# Altium PCB SolderingStation-CS.PcbDoc (part 1 of 2)
Units mm, origin at the board's own origin, x right, y up, seen from the top; angles counter-clockwise.
Board outline 138.15 x 60.81 mm, 2 copper layers (Top Layer, Bottom Layer), stack 1.671 mm thick; 179 components, 102 nets, 520 pads, 415 vias.
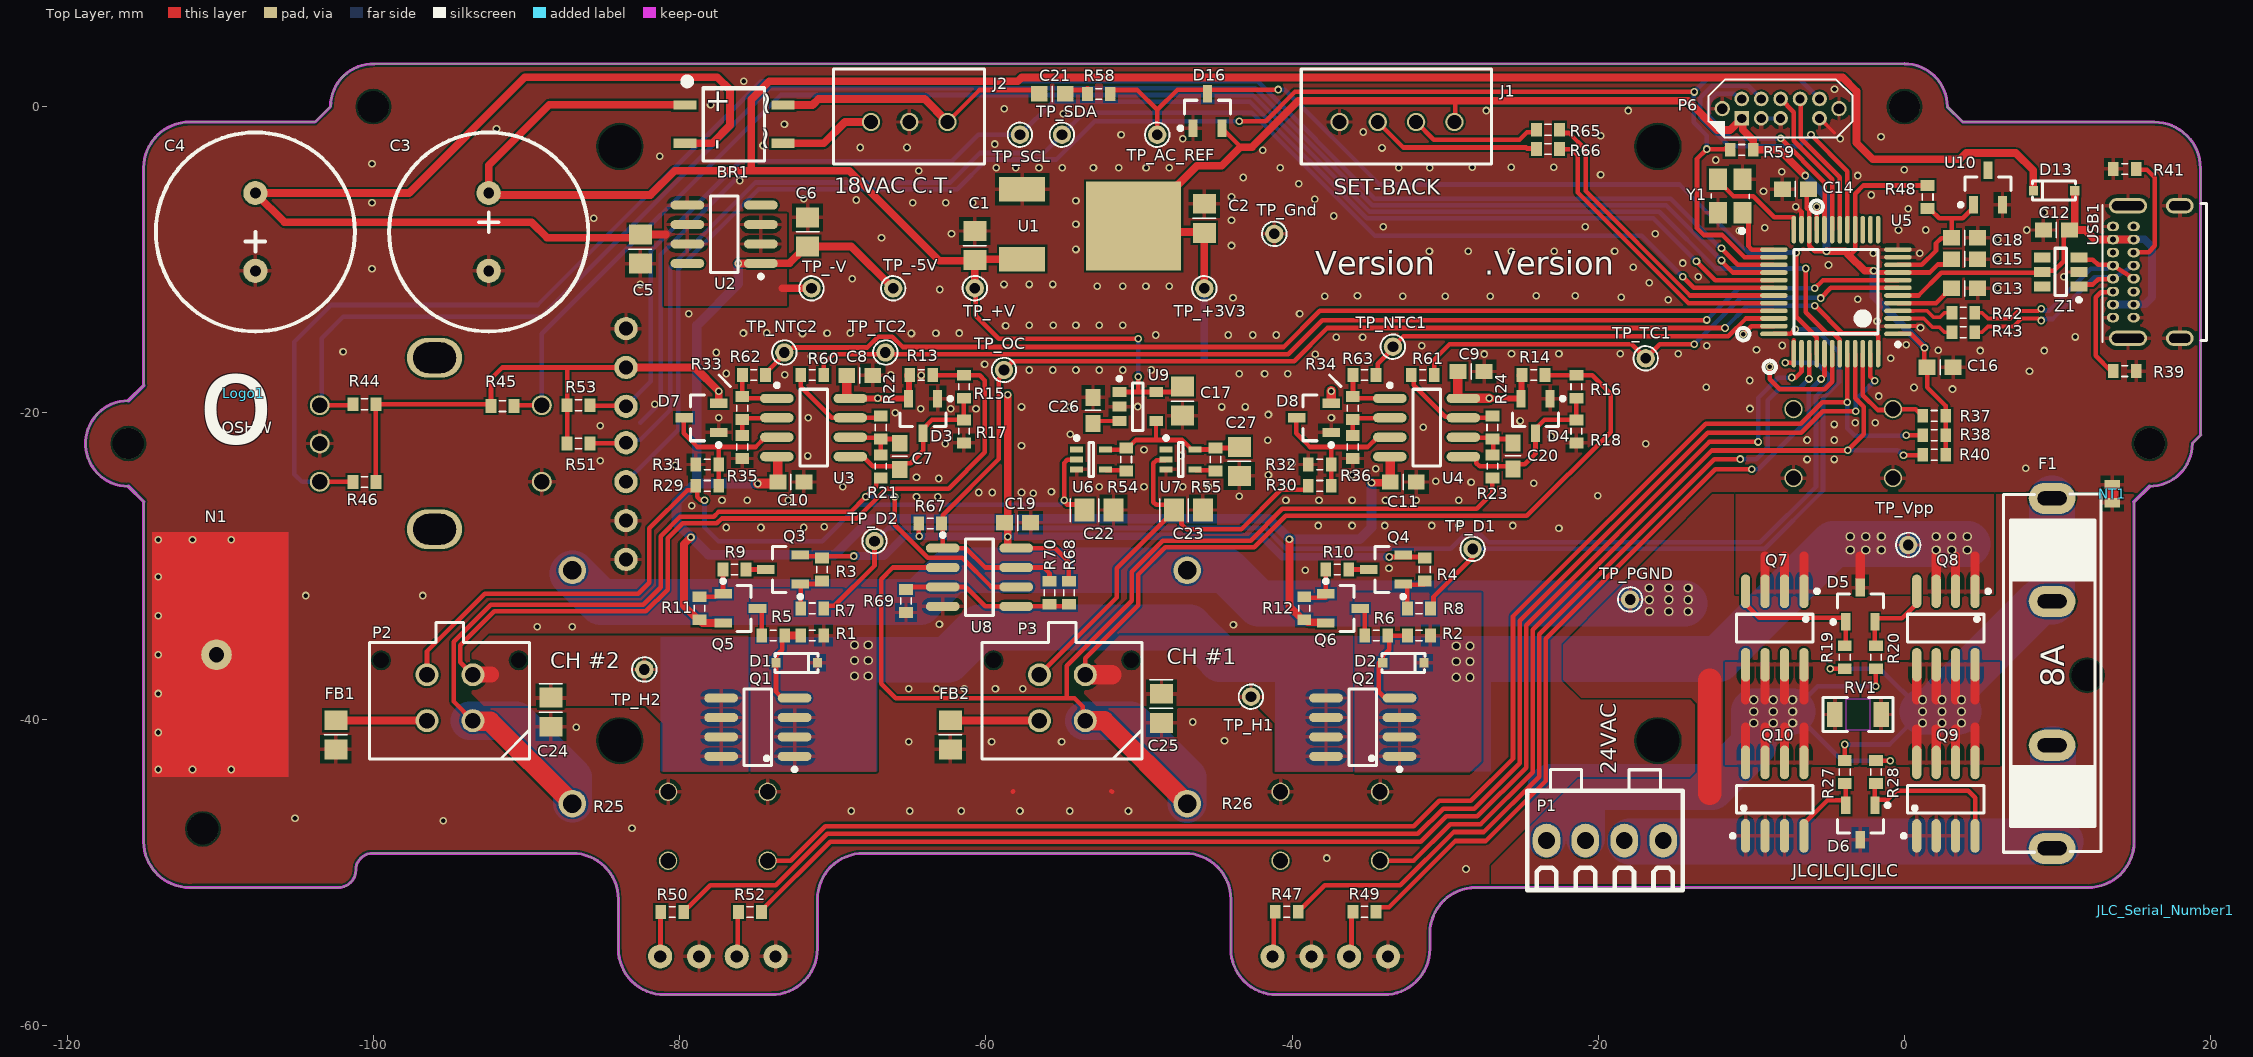
[diagram p0: Top Layer view]
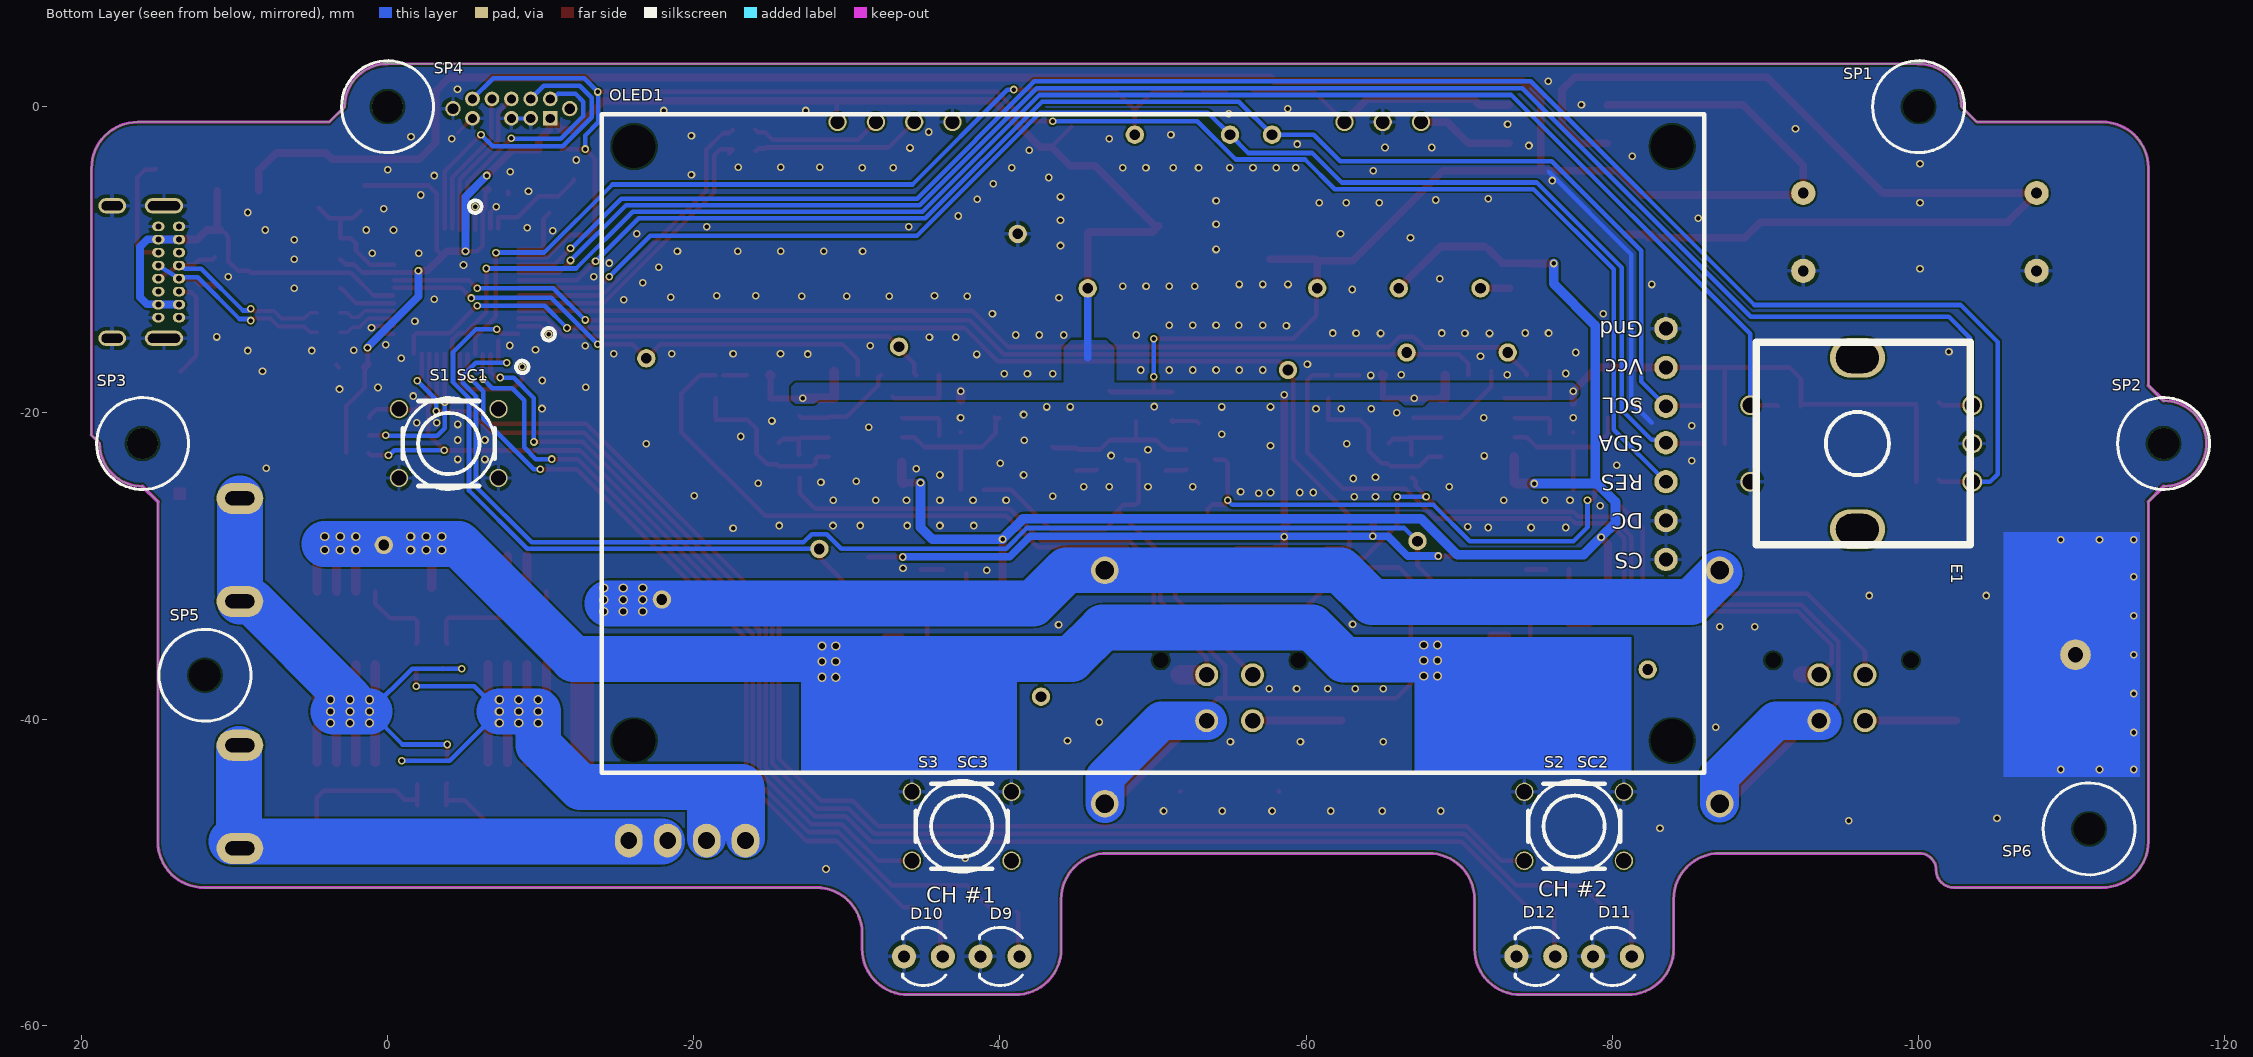
[diagram p1: Bottom Layer view, seen from below]

## Layer stack, top to bottom
Top Solder: solder mask 0.0102, Solder Resist, Dk 3.5
Top Layer: signal copper 0.0356
Dielectric 1: dielectric 1.6, FR-4, Dk 4.8
Bottom Layer: signal copper 0.0356
Bottom Solder: solder mask 0.0102, Solder Resist, Dk 3.5

## Board outline
-112,-51 -102.286,-51 ccw(c-102.286,-49.862) -101.148,-49.862 cw(c-100.048,-49.862) -100.048,-48.762 -100.048,-48.765 -87,-48.765 cw(c-87,-51.765) -84,-51.765 -84,-55 ccw(c-81,-55) -81,-58 -74,-58 ccw(c-74,-55) -71,-55 -71,-51.765 cw(c-68,-51.765) -68,-48.765 -47,-48.765 cw(c-47,-51.765) -44,-51.765 -44,-55 ccw(c-41,-55) -41,-58 -34,-58 ccw(c-34,-55) -31,-55 -31,-54 cw(c-28,-54) -28,-51 12,-51 ccw(c12,-48) 15,-48 15,-25.8 16,-24.8 ccw(c16,-22) 18.8,-22 19.355,-21.445 19.34,-21.445 19.34,-4.013 19.329,-4.013 ccw(c16.329,-4.013) 16.329,-1.013 16.329,-1 3.8,-1 2.8,0 ccw(c0,0) 0,2.8 0,2.814 -99.926,2.799 ccw(c-100,0) -102.8,0 -103.8,-1 -112,-1 ccw(c-112,-4) -115,-4 -115,-18.2 -116,-19.2 ccw(c-116,-22) -116,-24.8 -115,-25.8 -115,-48 ccw(c-112,-48)

## Design rules (kind name [scope] priority, off if disabled: settings)
Clearance [All] p1: gap=0.127 ignorepadtopadclearanceinfootprint=FALSE
DiffPairsRouting [All] p1: maxlimit=0.254 minlimit=0.254 mostfreqgap=0.254 toplayer_minwidth=0.254 toplayer_maxwidth=0.381 toplayer_prefwidth=0.381 bottomlayer_minwidth=0.254 bottomlayer_maxwidth=0.381 bottomlayer_prefwidth=0.381 maxuncoupledlength=12.7
HoleSize [All] p1: absolutevalues=TRUE maxlimit=3.1 minlimit=0.025 maxpercent=80.000 minpercent=20.000
MinimumSolderMaskSliver [All] p1 off: minsoldermaskwidth=0.254
PolygonConnect PolygonConnect_Via [IsPolygon vs IsVia] p1: connectstyle=Direct reliefconductorwidth=0.254 reliefentries=4 polygonreliefangle="90 Angle" airgapwidth=0.254
PolygonConnect [All] p2: connectstyle=Relief reliefconductorwidth=0.254 reliefentries=4 polygonreliefangle="90 Angle" airgapwidth=0.254
RoomDefinition SolderingStation_Control [InComponentClass('SolderingStation_Control')] p1: confinementstyle=ConfineIn formatcopy=TRUE lockcomponents=FALSE outline -121.043,-59.006 24,-59.006 24,5 -121.043,5
RoomDefinition SolderingStation_Power [InComponentClass('SolderingStation_Power')] p2: confinementstyle=ConfineIn formatcopy=TRUE lockcomponents=FALSE outline -121,-59 21,-59 21,5 -121,5
RoomDefinition SolderingStation_Processor [InComponentClass('SolderingStation_Processor')] p3: confinementstyle=ConfineIn formatcopy=TRUE lockcomponents=FALSE outline -121,-59 24,-59 24,5 -121,5
RoutingVias [All] p1: holewidth=0.711 width=1.27 viastyle="Through Hole" minholewidth=0.711 minwidth=1.27 maxholewidth=0.711 maxwidth=1.27
SilkToSilkClearance [All] p1 off: silktosilkclearance=0.254
SilkToSolderMaskClearance [IsPad] p1 off: minsilkscreentomaskgap=0.254 clearancetoexposedcopper=TRUE
SolderMaskExpansion [All] p1: expansion=0.102 istentingtop=FALSE
Width [All] p1: maxlimit=4 minlimit=0.254 preferedwidth=0.254
25 further rules are at their usual default settings.

## Classes and differential pairs
component class SolderingStation_Power: BR1 C1 C2 C3 C4 C5 C6 C17 C21 C26 C27 D5 D6 D13 D16 F1 J2 N1 NT1 P1 Q7 Q8 Q9 Q10 R19 R20 R27 R28 R58 RV1 SP1 SP2 SP3 SP4 SP5 SP6 TP_+3V3 TP_+V TP_-5V TP_-V TP_AC_REF TP_PGND TP_Vpp U1 U2 U9
component class SolderingStation_Processor: C12 C13 C14 C15 C16 C18 D9 D10 D11 D12 E1 J1 JLC_Serial_Number1 Logo1 OLED1 P6 R37 R38 R39 R40 R41 R42 R43 R44 R45 R46 R47 R48 R49 R50 R51 R52 R53 R59 R65 R66 S1 S2 S3 SC1 SC2 SC3 TP_Gnd TP_SCL TP_SDA U5 U10 USB1 Y1 Z1
component class SolderingStation_Control: C7 C8 C9 C10 C11 C19 C20 C22 C23 C24 C25 D1 D2 D3 D4 D7 D8 FB1 FB2 P2 P3 Q1 Q2 Q3 Q4 Q5 Q6 R1 R2 R3 R4 R5 R6 R7 R8 R9 R10 R11 R12 R13 R14 R15 R16 R17 R18 R21 R22 R23 R24 R25 R26 R29 R30 R31 R32 R33 R34 R35 R36 R54 R55 R60 R61 R62 R63 R67 R68 R69 R70 TP_D1 TP_D2 TP_H1 TP_H2 TP_NTC1 TP_NTC2 TP_OC TP_TC1 TP_TC2 U3 U4 U6 U7 U8
differential pair USBD: +USBD_P -USBD_N
differential pair USBD_R: +USBD_R_P -USBD_R_N

## Components (designator, comment, footprint, x,y, rotation, side; value= is the part's Value field where it differs from the comment)
BR1 "MB1S" MB1S -76.454,-1.143 r0 top
C1 "100nF" CCNP2012-0805 -60.718,-9.07 r270 top
C2 "10uF" CCNP2012-0805 -45.732,-7.292 r270 top
C3 "470uF/50V" RB5/13X21MM -92.468,-8.181 r270 top
C4 "470uF/50V" RB5/13X21MM -107.708,-8.181 r90 top
C5 "2.2uF" CCNP2012-0805 -82.562,-9.299 r90 top
C6 "10uF" CCNP2012-0805 -71.64,-8.181 r270 top
C7 "100nF" CCNP1608-0603 -65.62,-22.837 r90 top
C8 "100nF" CCNP1608-0603 -68.237,-17.551 r0 top
C9 "100nF" CCNP1608-0603 -28.308,-17.297 r0 top
C10 "100nF" CCNP1608-0603 -72.733,-24.511 r0 top
C11 "100nF" CCNP1608-0603 -32.733,-24.511 r0 top
C12 "100nF" CCNP1608-0603 9.919,-8.054 r0 top
C13 "2.2uF" CCNP1608-0603 3.925,-11.864 r180 top
C14 "100nF" CCNP1608-0603 -7.124,-5.387 r0 top
C15 "100nF" CCNP1608-0603 3.925,-9.959 r180 top
C16 "100nF" CCNP1608-0603 2.324,-17.018 r180 top
C17 "2.2uF" CCNP2012-0805 -47.154,-19.23 r90 top
C18 "100nF" CCNP1608-0603 3.925,-8.562 r180 top
C19 "100nF" CCNP1608-0603 -57.924,-27.18 r0 top
C20 "100nF" CCNP1608-0603 -25.564,-22.811 r90 top
C21 "100nF" CCNP1608-0603 -55.663,0.836 r0 top
C22 "1uF" CC2012-0805 -52.613,-26.342 r0 top
C23 "1uF" CC2012-0805 -46.771,-26.342 r0 top
C24 "1uF" CC2012-0805 -88.404,-39.55 r270 top
C25 "1uF" CC2012-0805 -48.526,-39.296 r270 top
C26 "100nF" CCNP1608-0603 -52.996,-19.84 r90 top
C27 "10uF" CCNP2012-0805 -43.446,-23.167 r90 top
D1 "BZT52C12S-7-F" SOD-323 -72.352,-36.322 r0 top
D2 "BZT52C12S-7-F" SOD-323 -32.728,-36.322 r0 top
D3 "BAV199LT1G" SOT23_N -64.097,-20.193 r90 top
D4 "BAV199LT1G" SOT23_N -24.097,-20.193 r90 top
D5 "DZ23C12" SOT23_N -2.883,-32.528 r270 top
D6 "AZ23C7V5" SOT23_N -2.883,-46.752 r90 top
D7 "BAV199LT1G" SOT23_N -78.575,-20.32 r0 top
D8 "BAV199LT1G" SOT23_N -38.57,-20.32 r0 top
D9 "LED" "LED3MM-RED - 10MM PROUD" -40,-55.5 r0 bottom locked
D10 "LED" "LED3MM-GREEN - 10MM PROUD" -35,-55.5 r0 bottom locked
D11 "LED" "LED3MM-RED - 10MM PROUD" -80,-55.5 r0 bottom locked
D12 "LED" "LED3MM-GREEN - 10MM PROUD" -75,-55.5 r0 bottom locked
D13 "NSR0530HT1G" SOD-323 9.767,-5.489 r180 top
D16 "BAT54S" SOT23_N -45.517,-0.279 r270 top
E1 "PEC12R-4217F" "ROTARYENCODER - PEC12R" -96,-22 r90 bottom locked
F1 "Bell FC-211-22" FUSE_CLIP_5x20 9.64,-37.01 r90 top
FB1 "Ferrite Bead" FB2012-0805 -102.451,-41.021 r90 top
FB2 "Ferrite Bead" FB2012-0805 -62.319,-41.021 r90 top
J1 "JST XH Connector, 4-Pin" JST-B4B-XH-AX -33.147,-1 r180 top
J2 "JST XH Connector, 3-Pin" JST-B3B-XH-AX -65,-1 r180 top
JLC_Serial_Number1 "JLC_Serial_Number" JLC_Serial_Number 17.056,-52.476 r90 top
Logo1 "OSHW Logo" OSHW -108.47,-18.722 r0 top
N1 "Nalclip-Edge" Nalclip-Edge -110.248,-35.791 r270 top
NT1 "NetTie" NetTie2 13.576,-25.273 r90 top net-tie
OLED1 "OLED_Display" OLED_DISPLAY_128X64_2.4INCH -50,-22 r0 bottom locked
P1 "Terminal4_BUCHANAN" TYCO-282834-4 -19.57,-47.932 r0 top
P2 "MOLEX-43045-0412" MOLEX-43045-0412 -95,-38.603 r0 top locked
P3 "MOLEX-43045-0412" MOLEX-43045-0412 -55,-38.603 r0 top locked
P6 "SWD Connector 2x5-Pin" SWD-2x5-Jig-Header -10.63,-0.762 r0 top locked
Q1 "FDS4675" SO-8_N -74.892,-40.529 r90 top
Q2 "FDS4675" SO-8_N -35.38,-40.529 r90 top
Q3 "MMBT3906LT1G" SOT23_N -73.241,-30.226 r0 top
Q4 "MMBT3906LT1G" SOT23_N -33.871,-30.226 r0 top
Q5 "MMBT3904LT1G" SOT23_N -76.035,-32.766 r180 top
Q6 "MMBT3904LT1G" SOT23_N -36.665,-32.766 r180 top
Q7 "FDS4675" SO-8_N -8.471,-34.052 r180 top
Q8 "FDS4675" SO-8_N 2.705,-34.052 r180 top
Q9 "FDS4672" SO-8_N 2.705,-45.228 r0 top
Q10 "FDS4672" SO-8_N -8.471,-45.228 r0 top
R1 "75K" CR1608-0603_N -71.336,-34.544 r0 top
R2 "75K" CR1608-0603_N -31.712,-34.544 r0 top
R3 "15K" CR1608-0603_N -70.701,-30.226 r270 top
R4 "15K" CR1608-0603_N -31.331,-30.226 r270 top
R5 "7k5" CR1608-0603_N -73.876,-34.544 r0 top
R6 "7k5" CR1608-0603_N -34.506,-34.544 r0 top
R7 "39K" CR1608-0603_N -71.336,-32.766 r0 top
R8 "39K" CR1608-0603_N -31.712,-32.766 r0 top
R9 "43K" CR1608-0603_N -76.416,-30.226 r0 top
R10 "43K" CR1608-0603_N -37.046,-30.226 r0 top
R11 "30K" CR1608-0603_N -78.702,-32.766 r270 top
R12 "30K" CR1608-0603_N -39.205,-32.766 r270 top
R13 "100K" CR1608-0603_N -64.224,-17.526 r180 top
R14 "100K" CR1608-0603_N -24.224,-17.526 r180 top
R15 "1K 1%" CR1608-0603_N -61.43,-18.288 r90 top
R16 "1K 1%" CR1608-0603_N -21.43,-18.288 r90 top
R17 "100K 1%" CR1608-0603_N -61.43,-21.209 r90 top
R18 "100K 1%" CR1608-0603_N -21.43,-21.209 r90 top
R19 "4K3" CR1608-0603_N -3.899,-35.957 r90 top
R20 "4K3" CR1608-0603_N -1.867,-35.957 r90 top
R21 "1K 1%" CR1608-0603_N -66.865,-23.495 r90 top
R22 "100K 1%" CR1608-0603_N -66.865,-20.955 r90 top
R23 "1K 1%" CR1608-0603_N -26.911,-23.495 r90 top
R24 "100K 1%" CR1608-0603_N -26.916,-20.955 r90 top
R25 "OAR3-R050FI" OAR3-R050FI -87.007,-37.899 r270 top
R26 "OAR3-R050FI" OAR3-R050FI -46.85,-37.899 r270 top
R27 "4K3" CR1608-0603_N -3.899,-43.45 r90 top
R28 "4K3" CR1608-0603_N -1.867,-43.45 r90 top
R29 "22K 1%" CR1608-0603_N -78.194,-24.765 r0 top
R30 "22K 1%" CR1608-0603_N -38.194,-24.765 r0 top
R31 "10K 1%" CR1608-0603_N -78.194,-23.368 r0 top
R32 "10K 1%" CR1608-0603_N -38.194,-23.368 r0 top
R33 "10K 1%" CR1608-0603_N -75.908,-19.685 r90 top
R34 "10K 1%" CR1608-0603_N -36.03,-19.685 r90 top
R35 "22K 1%" CR1608-0603_N -75.908,-22.225 r90 top
R36 "22K 1%" CR1608-0603_N -36.03,-22.225 r90 top
R37 "10K" CR1608-0603_N 1.943,-20.193 r0 top
R38 "10K" CR1608-0603_N 1.943,-21.463 r0 top
R39 "5k1" CR1608-0603_N 14.389,-17.272 r0 top
R40 "10K" CR1608-0603_N 1.943,-22.733 r0 top
R41 "5k1" CR1608-0603_N 14.389,-4.064 r180 top
R42 "33R" CR1608-0603_N 3.848,-13.462 r180 top
R43 "33R" CR1608-0603_N 3.848,-14.732 r180 top
R44 "10K" CR1608-0603_N -100.584,-19.431 r0 top
R45 "10K" CR1608-0603_N -91.567,-19.558 r180 top
R46 "10K" CR1608-0603_N -100.584,-24.511 r0 top
R47 "470R" CR1608-0603_N -40.348,-52.578 r180 top
R48 "1K" CR1608-0603_N 1.512,-5.895 r270 top
R49 "470R" CR1608-0603_N -35.268,-52.578 r0 top
R50 "470R" CR1608-0603_N -80.48,-52.594 r0 top
R51 "4k7" CR1608-0603_N -86.6,-22 r180 top
R52 "470R" CR1608-0603_N -75.4,-52.594 r0 top
R53 "4k7" CR1608-0603_N -86.6,-19.5 r180 top
R54 "1K2" CR1608-0603_N -50.835,-23.04 r90 top
R55 "1K2" CR1608-0603_N -44.993,-23.04 r90 top
R58 "15K" CR1608-0603_N -52.615,0.836 r0 top
R59 "10K" CR1608-0603_N -10.63,-2.819 r0 top
R60 "0R" CR1608-0603_N -71.336,-17.526 r180 top
R61 "0R" CR1608-0603_N -31.458,-17.526 r180 top
R62 "0R" CR1608-0603_N -75.146,-17.526 r180 top
R63 "0R" CR1608-0603_N -35.268,-17.526 r180 top
R65 "1K" CR1608-0603_N -23.281,-1.502 r180 top
R66 "1K" CR1608-0603_N -23.281,-2.772 r180 top
R67 "10K" CR1608-0603_N -63.639,-27.231 r180 top
R68 "10K 1%" CR1608-0603_N -54.572,-31.75 r90 top
R69 "1K 1%" CR1608-0603_N -65.214,-32.286 r90 top
R70 "100K" CR1608-0603_N -55.842,-31.75 r90 top
RV1 "V33MLA1206NHAUTO" VR3216-1206 -3.035,-39.7 r180 top
S1 "SW_PB-FSM4JAH" SW_MIN_PB-B3F1052 -4,-22 r180 bottom locked
S2 "SW_PB-FSM4JAH" SW_MIN_PB-B3F1052 -77.5,-47 r0 bottom locked
S3 "SW_PB-FSM4JAH" SW_MIN_PB-B3F1052 -37.5,-47 r0 bottom locked
SC1 "B32-2010" SW-CAP-B32-2010 -4,-22 r180 bottom locked
SC2 "B32-2010" SW-CAP-B32-2010 -77.5,-47 r180 bottom locked
SC3 "B32-2010" SW-CAP-B32-2010 -37.5,-47 r180 bottom locked
SP1 "6MM Spacer" SPACER-6MM#1 -100,0 r180 bottom locked
SP2 "6MM Spacer" SPACER-6MM#2 -116,-22 r180 bottom locked
SP3 "6MM Spacer" SPACER-6MM#2 16,-22 r180 bottom locked
SP4 "6MM Spacer" SPACER-6MM#2 0,0 r180 bottom locked
SP5 "6MM Spacer" Spacer-6mm 11.926,-37.137 r180 bottom
SP6 "6MM Spacer" Spacer-6mm -111.137,-47.17 r180 bottom
TP_+3V3 "Vdd" "PCBPIN - 0.7mm" -45.732,-11.864 r90 top
TP_+V "Vdd" "PCBPIN - 0.7mm" -60.718,-11.852 r90 top
TP_-5V "Vdd" "PCBPIN - 0.7mm" -66.052,-11.864 r90 top
TP_-V "Vdd" "PCBPIN - 0.7mm" -71.386,-11.864 r90 top
TP_AC_REF "Vdd" "PCBPIN - 0.7mm" -48.805,-1.831 r90 top
TP_D1 "Vdd" "PCBPIN - 0.7mm" -28.206,-28.882 r0 top
TP_D2 "Vdd" "PCBPIN - 0.7mm" -67.271,-28.374 r0 top
TP_Gnd "Gnd" "PCBPIN - 0.7mm" -41.16,-8.308 r90 top
TP_H1 "Vdd" "PCBPIN - 0.7mm" -42.684,-38.534 r0 top
TP_H2 "Vdd" "PCBPIN - 0.7mm" -82.308,-36.756 r0 top
TP_NTC1 "Vdd" "PCBPIN - 0.7mm" -33.413,-15.674 r0 top
TP_NTC2 "Vdd" "PCBPIN - 0.7mm" -73.164,-16.055 r0 top
TP_OC "Vdd" "PCBPIN - 0.7mm" -58.815,-17.197 r0 top
TP_PGND "Vdd" "PCBPIN - 0.7mm" -17.919,-32.184 r90 top
TP_SCL "SCL" "PCBPIN - 0.7mm" -57.772,-1.831 r90 top
TP_SDA "SDA" "PCBPIN - 0.7mm" -55.028,-1.831 r90 top
TP_TC1 "Vdd" "PCBPIN - 0.7mm" -16.903,-16.436 r0 top
TP_TC2 "Vdd" "PCBPIN - 0.7mm" -66.56,-16.055 r0 top
TP_Vpp "Vdd" "PCBPIN - 0.7mm" 0.242,-28.628 r90 top
U1 "NCP1117DT33T5G" TO-252 -53.987,-7.673 r180 top
U2 "MC79L05ACD" SOIC127P600-8N#1 -77.089,-8.333 r90 top
U3 "TLV2186" SOIC127P600-8N#1 -71.247,-20.955 r270 top
U4 "TLV2186" SOIC127P600-8N#2 -31.209,-20.955 r0 top
U5 "MK20DX128VLF5" TSQFP50P900X900-48N -4.476,-12.082 r90 top locked
U6 "PSSI2021SAY,115" SOT353-5N -53.121,-23.04 r0 top
U7 "PSSI2021SAY,115" SOT353-5N -47.279,-23.04 r0 top
U8 "LM393ADR" SOIC127P600-8N#2 -60.414,-30.734 r0 top
U9 "LK112" SOT23-5_L -50.075,-19.586 r180 top
U10 "LM4040BIM3-2.5/NOPB" SOT23_N 5.449,-5.285 r270 top
USB1 "USB4085-GF-A" USB4085-GF-A 15.8,-10.8 r180 top locked
Y1 "16 MHz" Crystal_SMD_3.2x2.5 -11.376,-5.832 r90 top
Z1 "CM1293A-04SO" SOT457_N 10.198,-10.795 r180 top locked

## Footprints (in the part's own frame and the unit in brackets; to place one, negate y for a bottom-side part, rotate by r counter-clockwise, add the part's x,y. Pads: shape width x height; smd on the part's side, far side on the other; paste and mask are expansions set on the pad)
CC2012-0805 [mm]
  rect 1.3x1.5 smd: 1(-0.95,0) 2(0.95,0)
  silkscreen extent -1.87,-0.75 0,0.75, body extent -1,-0.62 1,0.63, height 0.78
CCNP1608-0603 [mm]
  rect 1.1x1 smd: 1(-0.85,0) 2(0.85,0)
  silkscreen extent 0,-0.5 0,0.5, body extent -0.8,-0.4 0.8,0.4, height 0.3
CCNP2012-0805 [mm]
  rect 1.3x1.5 smd: 1(-0.95,0) 2(0.95,0)
  silkscreen extent 0,-0.75 0,0.75, body extent -1,-0.62 1,0.63, height 0.78
CR1608-0603_N [mm]
  rect 0.7x0.9 smd: 1(-0.75,0) 2(0.75,0)
  silkscreen extent -0.2,-0.35 0.2,0.35, body extent -0.85,-0.4 0.85,0.4, height 0.56
Crystal_SMD_3.2x2.5 [mm] "Crystal SMT low profile 3.2 x 2.5 SMD"
  rect 1.4x1.2 smd: 1(-1.1,-0.8) 2(1.1,-0.8) 3(1.1,0.8) 4(-1.1,0.8)
  silkscreen extent -2.39,-1.25 0.15,1.25, body extent -1.55,-1.24 1.65,1.26, height 0.7
FB2012-0805 [mm] "Ferrite Bead 0805"
  rect 1.3x1.5 smd: 1(-0.95,0) 2(0.95,0)
  silkscreen extent 0,-0.75 0,0.75, body extent -1,-0.62 1,0.63, height 0.85
FUSE_CLIP_5x20 [mil] "Fuse clip for 5x20 mm fuse PCB mounted"
  oval 80x120 hole 36 slot 75 at 90 deg: 1(-450,0) 1a(-185,0) 2(450,0) 2a(185,0)
  silkscreen extent -460,-126 461,125, body extent -460,-125 460,125, height 344
JLC_Serial_Number [mm] "JLC Serial Number"
JST-B3B-XH-AX [mm] "JST 3-pin connector PCB mount"
  round 1.2 hole 0.9: 1(-2.5,0) 2(0,0) 3(2.5,0)
  silkscreen extent -4.92,-3.45 4.95,2.75, body extent -4.95,-3.37 4.95,2.72, height 7
JST-B4B-XH-AX [mm] "JST 4-pin connector PCB mount"
  round 1.2 hole 0.9: 1(-3.75,0) 2(-1.25,0) 3(1.25,0) 4(3.75,0)
  silkscreen extent -6.17,-3.45 6.25,2.75, body extent -6.2,-3.37 6.2,2.72, height 7
"LED3MM-GREEN - 10MM PROUD" [mil] "LED 3mm through-hole"
  round 62 hole 31.5: A(-50,0) K(50,0)
  silkscreen extent -58,-75 53,75, body extent -75,-75 63,75, height 413
"LED3MM-RED - 10MM PROUD" [mil] "LED 3mm through-hole"
  round 62 hole 31.5: A(-50,0) K(50,0)
  silkscreen extent -58,-75 53,75, body extent -75,-75 63,75, height 413
MB1S [mm] "Bridge Rectifier Diode, Single Phase, 100 V, 800 mA, SOIC, 1.1 V, 4 Pins"
  rect 1.5x0.6 smd: 1(-3.2,1.25) 2(-3.2,-1.25) 3(3.2,-1.25) 4(3.2,1.25)
  silkscreen extent -3.25,-2.4 2,2.99, body extent -3.5,-2.35 3.5,2.35, height 2.4
MOLEX-43045-0412 [mm] "Wire-To-Board Connector, With Polarizing Peg, 3 mm, 4 Contacts, Header, Micro-Fit 3.0 43045 Series"
  round 0.8 hole 1.02: 0(-4.5,2.44) 0(4.5,2.44)
  round 1.5 hole 1.02: 1(1.5,-1.5) 2(-1.5,-1.5) 3(-1.5,1.5) 4(1.5,1.5)
  silkscreen extent -5.25,-4 5.2,4.9, body extent -5.07,-3.94 5.08,4.83, height 9.95
Nalclip-Edge [mm] "Nalclip on edge of PCB"
  round 2 hole 1: 1(0,0)
  Top Layer region: -8,-4.21 8,-4.21 8,4.705 -8,4.705
  Bottom Layer region: -8,-4.21 8,-4.21 8,4.705 -8,4.705
  body extent -6.4,-5.06 6.4,4.03, height 1.07
NetTie2 [mm] "Net Tie (Short)"
  rect 0.6x1 smd mask+0.102: 1(-0.6,0) 2(0.6,0)
  Top Layer region: -0.4,-0.4 0.4,-0.4 0.4,0.4 -0.4,0.4
OAR3-R050FI [mm] "Current Sense Resistor, 0.05 ohm, OAR Series, 3 W, Metal Strip, Radial Leaded, ± 1%"
  round 1.8 hole 1.2: 1(-7.62,0) 2(7.62,0)
  body extent -8.25,-0.82 8.23,0.83, height 24.21
OLED_DISPLAY_128X64_2.4INCH [mm] "Small OLED Display"
  round 2 hole 2.8: 0(-33.9,-19.4) 0(-33.9,19.4) 0(33.9,-19.4) 0(33.9,19.4)
  round 1.524 hole 0.9: 1(-33.5,7.572) 2(-33.5,5.032) 3(-33.5,2.492) 4(-33.5,-0.048) 5(-33.5,-2.428) 6(-33.5,-4.968) 7(-33.5,-7.508)
  silkscreen extent -36,-21.5 36,21.5, body extent -35.99,-21.45 36.01,21.55, height 6.4
OSHW [mm] "OSHW Logo"
"PCBPIN - 0.7mm" [mm]
  round 1.2 hole 0.7: 1(0,0)
  silkscreen extent -0.8,-0.8 0.8,0.8
RB5/13X21MM [mil]
  round 62 hole 28: 1(-100,0) 2(100,0)
  silkscreen extent -256,-256 256,256, body extent -256,-256 256,256, height 827
"ROTARYENCODER - PEC12R" [mm] "Bourns Rotary Encoder - PEC12R-4217F (17.5 mm)"
  oval 2.6x3.6 hole 2 slot 2.8 at 90 deg: 0(-5.6,0) 0(5.6,0)
  round 1.3 hole 1: A(-2.5,-7.5) B(2.5,-7.5) C(0,-7.5) D(-2.5,7) E(2.5,7)
  silkscreen extent -6.6,-7.37 6.6,6.6, body extent -7.5,-7.5 7.5,7.5, height 17.85
SO-8_N [mm] "8-Pin Small Outline Integrated Circuit 1.27 mm Pitch, IPC Medium Density"
  oval 0.6x2.2 smd: 1(-1.905,-2.4) 2(-0.635,-2.4) 3(0.635,-2.4) 4(1.905,-2.4) 5(1.905,2.4) 6(0.635,2.4) 7(-0.635,2.4) 8(-1.905,2.4)
  silkscreen extent -2.88,-2.53 2.5,0.9, body extent -2.5,-3.1 2.5,3.1, height 1.75
SOD-323 [mm]
  rect 0.6x0.6 smd: A(-1.35,0) K(1.35,0)
  silkscreen extent -1.41,-0.63 1.4,0.6, body extent -1.35,-0.63 1.35,0.62, height 1.1
SOIC127P600-8N#1 [mm] "SOIC, 8-Leads, Body 4.9x3.9mm, Pitch 1.27mm, IPC Medium Density"
  oval 0.6x2.2 smd: 1(-1.905,-2.4) 2(-0.635,-2.4) 3(0.635,-2.4) 4(1.905,-2.4) 5(1.905,2.4) 6(0.635,2.4) 7(-0.635,2.4) 8(-1.905,2.4)
  silkscreen extent -2.88,-2.53 2.5,0.9, body extent -2.5,-3.06 2.5,3.14, height 1.75
SOIC127P600-8N#2 [mm] "SOIC, 8-Leads, Body 4.9x3.9mm, Pitch 1.27mm, IPC Medium Density"
  oval 2.2x0.6 smd: 1(-2.4,1.905) 2(-2.4,0.635) 3(-2.4,-0.635) 4(-2.4,-1.905) 5(2.4,-1.905) 6(2.4,-0.635) 7(2.4,0.635) 8(2.4,1.905)
  silkscreen extent -2.52,-2.5 0.9,2.88, body extent -3.06,-2.5 3.14,2.5, height 1.75
SOT23-5_L [mm] "SOT23, 5-Leads, Body 2.9x1.6mm, Pitch 0.95mm, Lead Span 2.7mm, IPC High Density"
  rect 0.9x0.65 smd: 1(1.2,-0.95) 2(1.2,0) 3(1.2,0.95) 4(-1.2,0.95) 5(-1.2,-0.95)
  silkscreen extent -0.35,-1.95 1.32,1.55, body extent -1.4,-1.45 1.4,1.45, height 1.45
SOT23_N [mm] "SOT23, 3-Leads, Body 2.9x1.3mm, Pitch 0.95mm, Lead Span 2.3mm - IPC Medium Density"
  rect 1.15x0.6 smd: 1(1.125,-0.95) 2(1.125,0.95) 3(-1.125,0)
  silkscreen extent -0.7,-1.9 1.25,1.5, body extent -1.25,-1.5 1.25,1.5, height 1.05
SOT353-5N [mm] "SOT353, 5-Leads, Body 2x1.3mm, Pitch 0.65mm, Lead Span 2.1mm, IPC Medium Density"
  rect 0.85x0.4 smd: 1(-0.95,0.65) 2(-0.95,0) 3(-0.95,-0.65) 4(0.95,-0.65) 5(0.95,0.65)
  silkscreen extent -1.07,-1.1 0.15,1.52, body extent -1.2,-1.1 1.2,1.1, height 1.1
SOT457_N [mm] "SOT23, 6-Leads, Body 2.9x1.5mm, Pitch 0.95mm, Lead Span 2.8mm, IPC Medium Density"
  rect 1.1x0.65 smd: 1(-1.2,0.95) 2(-1.2,0) 3(-1.2,-0.95) 4(1.2,-0.95) 5(1.2,0) 6(1.2,0.95)
  silkscreen extent -1.33,-1.55 0.38,1.95, body extent -1.34,-1.5 1.5,1.4, height 1.21
SPACER-6MM#1 [mm]
  round 2 hole 2.05: 3(0,0)
  silkscreen extent -3,-3 3,3, body extent -3,-3 3,3, height 6
SPACER-6MM#2 [mm]
  round 2 hole 2.05: 0(0,0)
  silkscreen extent -3,-3 3,3, body extent -3,-3 3,3, height 6
Spacer-6mm [mm]
  round 2 hole 2.05: 0(0,0)
  silkscreen extent -3,-3 3,3, body extent -3,-3 3,3, height 6
SW-CAP-B32-2010 [mm] "Switch cap for small push-button switch 6mm dia."
  silkscreen extent -3,-3 3,3, body extent -3,-3 3,3, height 10
SW_MIN_PB-B3F1052 [mm] "Miniature PCB Push Button projected plunger"
  round 1.2 hole 1: 1(3.25,-2.25) 1b(-3.25,-2.25) 2(3.25,2.25) 2b(-3.25,2.25)
  silkscreen extent -3,-2.77 3,2.78, body extent -3.85,-3 3.85,3, height 6.7
SWD-2x5-Jig-Header [mm] "Connector; SWD; 2x5 Position"
  round 1 hole 0.7: 0(-1.27,0.635) 0(6.35,0.635)
  rect 0.96x0.96 hole 0.6: 1(0,0)
  round 0.96 hole 0.6: 2(0,1.27) 3(1.27,0) 4(1.27,1.27) 5(2.54,0) 6(2.54,1.27) 8(3.81,1.27) 9(5.08,0) 10(5.08,1.27)
  silkscreen extent -2.16,-1.26 7.24,2.53, body extent -0.63,-1.09 5.72,2.31, height 4.5
TO-252 [mm] "TO-252 Package"
  rect 3x1.6 smd: 1(3.64,-2.285) 3(3.64,2.285)
  rect 6.2x5.8 smd: 4(-3.64,0.127)
  body extent -5.71,-3.14 4.23,3.4, height 2.29
TSQFP50P900X900-48N [mm] "Thin QFP, 48-Leads, Body 7x7mm, Pitch 0.5mm, IPC Medium Density"
  oval 0.3x1.8 smd: 1(-2.75,-4.05) 2(-2.25,-4.05) 3(-1.75,-4.05) 4(-1.25,-4.05) 5(-0.75,-4.05) 6(-0.25,-4.05) 7(0.25,-4.05) 8(0.75,-4.05) 9(1.25,-4.05) 10(1.75,-4.05) 11(2.25,-4.05) 12(2.75,-4.05) 25(2.75,4.05) 26(2.25,4.05) 27(1.75,4.05) 28(1.25,4.05) 29(0.75,4.05) 30(0.25,4.05) 31(-0.25,4.05) 32(-0.75,4.05) 33(-1.25,4.05) 34(-1.75,4.05) 35(-2.25,4.05) 36(-2.75,4.05)
  oval 1.8x0.3 smd: 13(4.05,-2.75) 14(4.05,-2.25) 15(4.05,-1.75) 16(4.05,-1.25) 17(4.05,-0.75) 18(4.05,-0.25) 19(4.05,0.25) 20(4.05,0.75) 21(4.05,1.25) 22(4.05,1.75) 23(4.05,2.25) 24(4.05,2.75) 37(-4.05,2.75) 38(-4.05,2.25) 39(-4.05,1.75) 40(-4.05,1.25) 41(-4.05,0.75) 42(-4.05,0.25) 43(-4.05,-0.25) 44(-4.05,-0.75) 45(-4.05,-1.25) 46(-4.05,-1.75) 47(-4.05,-2.25) 48(-4.05,-2.75)
  silkscreen extent -3.57,-4.18 2.75,2.75, body extent -4.5,-4.5 4.5,4.5, height 1.6
TYCO-282834-4 [mm] "Terminal Block (2.54mm)"
  oval 1.8x2.2 hole 1.1: 1(-3.81,0) 2(-1.27,0) 3(1.27,0) 4(3.81,0)
  silkscreen extent -5.08,-3.25 5.08,3.25, body extent -5.32,-3.25 5.3,3.25, height 10
USB4085-GF-A [mm] "USB-C Connector"
  oval 0.8x0.62 hole 0.4: A1(2.18,2.975) A4(2.18,2.125) A5(2.18,1.275) A6(2.18,0.425) A7(2.18,-0.425) A8(2.18,-1.275) A9(2.18,-2.125) A12(2.18,-2.975) B1(0.83,-2.975) B4(0.83,-2.125) B5(0.83,-1.275) B6(0.83,-0.425) B7(0.83,0.425) B8(0.83,1.275) B9(0.83,2.125) B12(0.83,2.975)
  oval 1.8x1 hole 0.6 slot 1.4 at 0 deg: SH(-2.18,4.325) SH(-2.18,-4.325)
  oval 2.5x1 hole 0.6 slot 2.1 at 0 deg: SH(1.2,4.325) SH(1.2,-4.325)
  silkscreen extent -3.92,-4.47 2.88,4.57, body extent -6.41,-4.52 2.76,4.51, height 3.46
VR3216-1206 [mm] "Varistor 1206"
  rect 1.02x1.65 smd: 1(-1.52,0) 2(1.52,0)
  Top Layer keep-out region: -0.8,-1 0.8,-1 0.8,1 -0.8,1
  silkscreen extent -2.3,-1.1 2.3,1.1, body extent -1.6,-0.85 1.6,0.85, height 1.86

## Part data
BR1: "Bridge Rectifier Diode, Single Phase, 100 V, 800 mA, SOIC, 1.1 V, 4 Pins"
C1 C5 C17: library part Cap_CCNP_0805, "Capacitor non-polar SMT 0805"
C2 C6 C13 C27: library part Cap, "Capacitor"
C3 C4: library part Cap-RB5/13x21MM
C7 C8 C9 C10 C11 C12 C14 C15 C16 C18 C19 C20 C21 C26: library part Cap_CCNP_0603, "Capacitor non-polar SMT 0603"
C22 C23 C24 C25: library part Cap_CC_0805, "Capacitor SMT 0805"
D1 D2: "Surface Mount Zener Diode, 12-13 V, -65 to 150 degC, 2-Pin SMD (SOD-123), RoHS, Tape and Reel"
D3 D4 D7 D8: "Dual Series low-leakage switching diodes, 3-Pin SOT-23"
D5: library part DZ23Cxx, "Dual silicon planar Zener diodes"
D6: library part AZ23Cxx, "Dual silicon planar Zener diodes"
D9 D11: library part LED_3MM_RED, "3mm Red LED"
D10 D12: library part LED_3MM_GREEN, "3mm Green LED"
D13: "Schottky Rectifier, 30 V, 500 mA, Single, SOD-323, 2 Pins, 620 mV"
D16: "Dual  Series Schottky Diodes, SOT23"
E1: library part "Rotary Encoder - PEC12R-4217F", "Rotary Encoder Bourns / 17.5 mm shaft"
F1: library part FUSE_CLIP_5x20, "5x20mm fuse clip PCB Mount"
FB1 FB2: library part "Ferrite Bead 0805", "Ferrite Bead SMT 0805, TDK MPZ2012S102AT, 0.15OHM, 1.5A"
J1: library part JST-B4B-XH-A
J2: library part JST-B3B-XH-A
NT1: library part NetTie2
OLED1: library part OLED_Display_128x64_2.4inch, "OLED Display 128x64 pixels,  / 2.4\""
P1: "2.54mm Terminal Block"
P2 P3: "Wire-To-Board Connector, With Polarizing Peg, 3 mm, 4 Contacts, Header, Micro-Fit 3.0 43045 Series"
P6: library part SWD2X5_JIG
Q1 Q2 Q7 Q8: "P-Channel Power MOSFET, 11 A, 40 V, RDS(ON) = 0.013 Ω @ VGS = -10   VRDS(ON) = 0.017 Ω @ VGS =   -4.5 VC"
Q3 Q4: "General Purpose Transistor, PNP Silicon, 3-Pin SOT-23, Pb-Free, Tape and Reel"
Q5 Q6: "General Purpose Transistor, NPN Silicon, 3-Pin SOT-23, Pb-Free, Tape and Reel"
Q9 Q10: "N-Channel Power MOSFET, 11 A, 40 V. RDS(ON)  = 13 mΩ @ VGS = 4.5 V"
R1 R2 R3 R4 R5 R6 R7 R8 R9 R10 R11 R12 R13 R14 R15 R16 R17 R18 R19 R20 R21 R22 R23 R24 R27 R28 R29 R30 R31 R32 R33 R34 R35 R36 R37 R38 R39 R40 R41 R42 R43 R44 R45 R46 R47 R48 R49 R50 R51 R52 R53 R54 R55 R58 R59 R60 R61 R62 R63 R65 R66 R67 R68 R69 R70: library part Res_CR0603, "Resistor SMT 0603"
R25 R26: "Current Sense Resistor, 0.05 ohm, OAR Series, 3 W, Metal Strip, Radial Leaded, ± 1%"
RV1: "V33MLA1206NH - TVS Varistor, 26 V, 33 V, MLA Series, 75 V, 1206 [3216 Metric], Multilayer Varistor (MLV)"
S1 S2 S3: library part SW_PB-B3F1052, "Switch miniature push-button"
SC1 SC2 SC3: library part "Switch-Cap - B32-2010", "Switch Cap"
SP1 SP2 SP3 SP4 SP5 SP6: library part Spacer-6mm
TP_+3V3 TP_+V TP_-5V TP_-V TP_AC_REF TP_D1 TP_D2 TP_Gnd TP_H1 TP_H2 TP_NTC1 TP_NTC2 TP_OC TP_PGND TP_SCL TP_SDA TP_TC1 TP_TC2 TP_Vpp: library part TP, "Test Point"
U1: "IC REG LINEAR +3V3 1A TO252-3"
U2: "IC REG LINEAR -5V 100MA SOIC-8"
U3 U4: "Dual Precision,Rail-to-Rail Input and Output, 4.5-24V, Zero-Drift OperationalAmplifier"
U5: "Kinetis K20: 50MHz Cortex-M4 Performance MCU, 160KB Flash, 16KB SRAM, Full-Speed USB, 48-LQFP"
U6 U7: "Adjustable Current Source, SOT353, Stabilized output current between 15μA and 50 mA."
U8: "IC DUAL DIFF COMPARATOR 8-SOIC"
U9: library part LK112M80TR, "LDO Regulator - 8V, 250mA"
U10: "IC 2.5V VREF SHUNT 0.2% SOT23-3"
USB1: "USB-C, USB 2.0 Receptacle Connector 16 Position Through Hole, Right Angle"
Y1: library part "Crystal 16MHz", "Crystal SMD 3.2 x 2.5 x 0.7 mm"
Z1: "Ultra low capacitance quadruple rail-to-rail ESD protection"

## Via types
v1: diameter 0.5, hole 0.3, Top Layer to Bottom Layer, tented both sides, 350 vias
v2: diameter 0.6, hole 0.4, Top Layer to Bottom Layer, tented both sides, 51 vias
v3: diameter 0.5, hole 0.3, Top Layer to Bottom Layer, 14 vias

## Nets (pads, with @x,y where several pads share a name; then routed paths per layer and width w, separated by ;. In a path a pad name is that pad's centre, name@x,y a point inside that pad or via, vN(x,y) a via of type N, cw(c..) or ccw(c..) an arc to the next point about the centre after c; other vN are vias at no path point)
5V_USB: C12.2 D13.A U5.6 USB1.A4 USB1.A9 USB1.B4 USB1.B9 Z1.5 | length 29.7
  Top Layer w0.3: U5.6@-0.376,-12.332 0.917,-12.332 2.401,-10.848 8.945,-10.848 Z1.5@8.998,-10.795 9.072,-10.721 9.767,-10.721 10.402,-10.086 10.402,-8.57 10.471,-8.501 10.471,-8.404 10.821,-8.054 10.918,-8.054 C12.2@11.117,-7.855
  Top Layer w0.5: C12.2@11.117,-7.855 D13.A@11.117,-5.489
  Top Layer w0.508: C12.2@10.918,-8.054 11.799,-8.054 12.42,-8.675 USB1.A9@13.62,-8.675 USB1.B4@14.97,-8.675
  Bottom Layer w0.508: USB1.A4@13.62,-12.925 USB1.B9@14.97,-12.925 ; USB1.A9@13.62,-8.675 USB1.B4@14.97,-8.675 ; USB1.B9@14.991,-12.904 15.709,-12.904 16.167,-12.446 16.167,-9.144 15.677,-8.654 USB1.B4@14.991,-8.654
+3V3: C2.2 C8.1 C9.1 C14.2 C15.2 C16.2 C19.1 D3.2 D4.2 D7.2 D8.2 D16.2 J1.1 OLED1.6 P6.1 Q3.2 Q4.2 R3.1 R4.1 R13.2 R14.2 R37.2 R38.2 R40.2 R44.2 R45.2 R46.2 R48.1 R51.2 R53.2 R59.2 R67.2 R68.2 TP_+3V3.1 U1.4 U3.8 U4.8 U5.1 U5.9 U5.16 U5.22 U8.8 | length 221
  Top Layer w0.3: R46.2@-99.834,-24.511 R44.2@-99.834,-19.431 -92.444,-19.431 R45.2@-92.317,-19.558 -92.317,-17.768 -91.581,-17.032 -87.249,-17.032 ; R51.2@-87.35,-22 R53.2@-87.35,-19.5 -87.35,-17.133 -87.249,-17.032 ; OLED1.6@-83.5,-17.032 -87.249,-17.032 ; Q3.2@-72.055,-29.351 v1(-68.631,-29.351) ; v1@-64.368,-28.026 R67.2@-64.368,-27.352 ; U8.8@-58.014,-28.829 -55.461,-28.829 -54.572,-29.718 R68.2@-54.572,-31 ; -46.222,-3.851 -46.21,-3.863 ; D16.2@-44.655,-1.326 -43.382,-2.599 -43.382,-2.656 ; v1(-33.647,-29.41) R4.1@-31.397,-29.41 ; J1.1@-29.397,-1 -29.349,-0.952 -29.349,0.381 ; C14.2@-6.431,-5.544 C14.2@-6.274,-5.387 ; C14.2@-6.381,-5.745 -6.381,-6.621 -6.226,-6.776 U5.22@-6.226,-8.032 -6.226,-9.079 -5.854,-9.451 v1(-5.092,-9.451) ; -3.593,-9.73 -3.226,-9.363 U5.16@-3.226,-8.032 -3.226,-5.68 -2.691,-5.145 R48.1@1.512,-5.145 ; v1(-2.019,-10.721) -1.964,-10.721 -1.853,-10.832 U5.9@-0.426,-10.832 1.655,-10.832 2.178,-10.309 2.725,-10.309 C15.2@3.075,-9.959 ; U5.1@-0.376,-14.832 0.416,-14.832 1.293,-15.709 C16.2@1.293,-16.837 ; C16.2@1.474,-17.018 1.474,-18.327 2.693,-19.546 R37.2@2.693,-20.193 R38.2@2.693,-21.463 R40.2@2.693,-22.606
  Top Layer w0.4: U3.8@-68.809,-19.05 v1(-67.069,-19.05) D3.2@-65.047,-19.05 ; D3.2@-65.01,-19.031 R13.2@-65.01,-17.563 ; v1(-27.115,-19.05) D4.2@-25.011,-19.05 ; D4.2@-25.011,-19.031 R14.2@-25.011,-17.563
  Top Layer w0.5: D7.2@-77.45,-19.37 v1(-77.45,-18.581) ; R67.2@-64.389,-27.331 R67.2@-64.368,-27.352 ; C19.1@-58.774,-27.18 -58.559,-26.965 v1@-58.559,-18.849 ; C19.1@-58.752,-27.178 -58.569,-27.361 v1(-58.569,-28.086) -58.569,-28.811 -58.552,-28.829 U8.8@-58.014,-28.829 ; -46.21,-3.863 -44.589,-3.863 -43.382,-2.656 -42.618,-2.656 -39.581,0.381 -29.349,0.381 -14.135,0.381 -12.23,-1.524 -11.392,-1.524 P6.1@-10.63,-0.762 -10.565,-0.827 -10.565,-1.516 -9.88,-2.201 R59.2@-9.88,-2.819 -8.168,-2.819 v1(-6.489,-4.498) ; v1(-5.092,-9.451) -3.873,-9.451 -3.593,-9.73 -2.603,-10.721 v1(-2.019,-10.721) ; C16.2@1.293,-16.837 C16.2@1.474,-17.018
  Top Layer w0.508: OLED1.6@-83.5,-17.032 -78.999,-17.032 v1(-77.45,-18.581) ; -46.21,-3.863 -50.147,-7.8 U1.4@-50.347,-7.8 -49.966,-8.181 -45.793,-8.181 C2.2@-45.732,-8.242 TP_+3V3.1@-45.732,-11.864 ; C14.2@-6.539,-5.431 C14.2@-6.539,-5.387
  Top Layer w0.635: C8.1@-69.087,-17.551 -69.087,-19.032 -69.07,-19.05 U3.8@-68.847,-19.05 U3.8@-68.809,-19.05 ; R13.2@-65.01,-17.563 R13.2@-64.974,-17.526 ; D8.2@-37.445,-19.128 v1(-37.445,-18.576) ; C9.1@-29.158,-17.297 -29.158,-17.466 -29.172,-17.48 -29.172,-19.032 -29.154,-19.05 U4.8@-28.809,-19.05 v1(-27.115,-19.05) ; R14.2@-25.011,-17.563 R14.2@-24.974,-17.526
  Bottom Layer w0.5: v1(-68.631,-29.351) -66.648,-29.351 -65.345,-28.048 v1(-64.346,-28.048) -41.969,-28.048 -40.627,-29.39 -33.667,-29.39 v1(-33.647,-29.41) ; v1(-2.019,-10.721) -2.019,-12.397 1.309,-15.725 v1(1.309,-15.75)
  Bottom Layer w0.508: -45.732,-16.402 TP_+3V3.1@-45.732,-11.864 TP_+3V3.1@-45.732,-11.797 ; v1(-6.489,-4.498) -5.092,-5.895 v1(-5.092,-9.451)
  other v1: -58.559,-18.824
+3V3_USB: C13.2 U5.5 | length 3.9
  Top Layer w0.3: U5.5@-0.426,-12.832 2.057,-12.832 3.025,-11.864 C13.2@3.075,-11.864
+8V: C27.2 R54.2 R55.2 U6.5 U7.5 U9.4 | length 10.6
  Top Layer w0.254: -48.875,-21.77 U9.4@-48.875,-20.536
  Top Layer w0.3: U6.5@-52.171,-22.39 -52.156,-22.405 -50.95,-22.405 R54.2@-50.835,-22.29 -50.735,-22.29 -50.215,-21.77 -48.875,-21.77 -47.174,-21.77 -46.554,-22.39 U7.5@-46.329,-22.39 -45.093,-22.39 R55.2@-44.993,-22.29 -43.519,-22.29 C27.2@-43.446,-22.217
+9V: BR1.1 C1.2 C3.1 C17.2 D13.K TP_+V.1 U1.3 U9.1 U9.5 | length 171.8
  Top Layer w0.3: TP_+V.1@-60.669,-11.901 -60.669,-13.642 -59.145,-15.166 v1(-50.05,-15.166) ; U9.1@-51.275,-18.636 -50.047,-18.636 ; v1(-50.05,-17.63) -50.047,-17.633 -50.047,-18.636 ; C17.2@-47.154,-18.559 -47.231,-18.636 U9.5@-48.875,-18.636 -50.047,-18.636
  Top Layer w0.5: C3.1@-92.468,-5.641 -92.468,-3.822 -88.519,0.127 -79.674,0.127 BR1.1@-79.654,0.107 ; C3.1@-92.341,-5.768 -81.905,-5.768 -80.328,-4.191 -75.323,-4.191 ; TP_+V.1@-60.669,-11.901 TP_+V.1@-60.718,-11.852 C1.2@-60.718,-10.062 ; U1.3@-57.627,-9.958 -60.656,-9.958 C1.2@-60.718,-10.02 C1.2@-60.718,-10.062 ; D13.K@8.417,-5.489 8.417,-4.164 7.278,-3.025 4.027,-3.025 3.622,-3.429 -2.06,-3.429 -3.137,-2.352 -3.137,1.016 -4.026,1.905 -57.658,1.905 -57.912,1.651 -74.143,1.651 -75.323,0.471 -75.323,-4.191 ; -75.323,-4.191 -68.92,-4.191 -63.049,-10.062 C1.2@-60.718,-10.062
  Bottom Layer w0.3: v1(-50.05,-17.63) v1(-50.05,-15.166)
-5V: C6.2 C10.1 C11.1 Q5.2 Q6.2 R11.2 R12.2 TP_-5V.1 U2.1 U3.4 U4.4 | length 104.8
  Top Layer w0.508: v1(-79.26,-28.12) -79.718,-28.578 -79.718,-32.6 R11.2@-78.802,-33.516 ; R11.2@-78.502,-33.716 Q5.2@-77.16,-33.716 Q5.2@-77.178,-33.698 ; v1(-76.161,-10.238) U2.1@-74.689,-10.238 -74.671,-10.221 -72.83,-10.221 C6.2@-71.935,-9.326 ; C6.2@-71.64,-9.131 -68.785,-9.131 TP_-5V.1@-66.052,-11.864 ; v1@-40.163,-28.247 -40.163,-32.658 R12.2@-39.305,-33.516 ; R12.2@-38.951,-33.67 Q6.2@-37.836,-33.67 ; v1(-34.81,-24.564) -33.738,-24.564 C11.1@-33.687,-24.615
  Top Layer w0.635: v1(-74.891,-24.615) -73.687,-24.615 C10.1@-73.583,-24.511 U3.4@-73.583,-22.886 ; R12.2@-39.305,-33.516 R12.2@-39.205,-33.516 R12.2@-39.105,-33.516 ; C11.1@-33.687,-24.615 C11.1@-33.583,-24.511 -33.583,-23.216
  Bottom Layer w0.635: v1(-76.161,-10.238) -76.161,-11.559 -78.879,-14.277 -78.879,-24.615 ; v1(-74.891,-24.615) -78.879,-24.615 ; v1(-34.81,-24.564) -34.81,-27.485 -35.572,-28.247 v1(-40.169,-28.247) -41.494,-26.922 -67.521,-26.922 -69.862,-29.263 -78.117,-29.263 v1(-79.26,-28.12) -80.2,-27.18 -80.2,-25.809 -79.006,-24.615 -78.879,-24.615
-9V: BR1.2 C4.2 C5.2 TP_-V.1 U2.2 U2.3 U2.6 U2.7 | length 70.4
  Top Layer w0.5: C5.2@-82.562,-8.562 -88.658,-8.562 -89.674,-7.546 -105.803,-7.546 C4.2@-107.708,-5.641 -97.675,-5.641 -90.104,1.93 -77.546,1.93 -76.708,1.092 -76.708,-1.219 -77.882,-2.393 BR1.2@-79.654,-2.393 ; C5.2@-82.349,-8.562 C5.2@-82.562,-8.349 -82.349,-8.349 -80.908,-8.349 ; -73.291,-11.864 TP_-V.1@-71.386,-11.864
AC24a: P1.1 P1.2 Q7.5 Q7.6 Q7.7 Q7.8 Q10.5 Q10.6 Q10.7 Q10.8 R20.1 R28.2 RV1.2 | length 59.7
  Top Layer w0.3: v1(-1.867,-37.846) R20.1@-1.867,-36.707 ; R28.2@-1.866,-42.725 v1(-0.925,-42.725)
  Top Layer w0.6: Q10.8@-10.376,-42.828 -10.376,-40.529 ; -10.376,-38.751 Q7.5@-10.376,-36.452 ; Q10.7@-9.106,-42.828 -9.106,-40.529 ; -9.106,-38.751 -9.106,-38.735 Q7.6@-9.106,-36.452 ; Q10.6@-7.836,-42.828 -7.836,-40.529 ; -7.836,-38.751 Q7.7@-7.836,-36.452 ; Q10.5@-6.566,-42.828 -6.566,-40.529 ; -6.566,-38.751 Q7.8@-6.566,-36.452
  Bottom Layer w0.3: v1(-1.867,-37.846) -5.652,-37.846 v2(-7.303,-39.497) -4.075,-42.725 v1(-0.925,-42.725)
  Bottom Layer w2.54: P1.1@-23.38,-47.805 -23.38,-44.681 ; P1.2@-20.84,-47.805 -20.84,-44.681
  Bottom Layer w3: -23.126,-44.427 -12.593,-44.427 -9.843,-41.677 v2(-9.843,-40.259) v2(-9.843,-39.497) v2(-8.573,-39.497) v2(-7.303,-39.497)
  other v2: -8.573,-40.259 -7.303,-40.259 -9.843,-38.735 -8.573,-38.735 -7.303,-38.735
AC24b: F1.2 F1.2a Q8.5 Q8.6 Q8.7 Q8.8 Q9.5 Q9.6 Q9.7 Q9.8 R19.1 R27.2 RV1.1 | length 52.6
  Top Layer w0.3: v1(-4.84,-36.707) R19.1@-3.899,-36.707 ; v1(-3.899,-41.656) R27.2@-3.899,-42.7 R27.2@-3.799,-42.7 ; R19.1@-3.599,-36.753 R19.1@-3.599,-36.653
  Top Layer w0.6: 0.8,-40.64 Q9.8@0.8,-42.028 ; 0.8,-38.735 Q8.5@0.8,-36.452 ; Q9.7@2.07,-42.828 2.07,-40.64 ; 2.07,-38.735 Q8.6@2.07,-36.452 ; Q9.6@3.34,-42.828 3.34,-40.64 ; 3.34,-38.735 Q8.7@3.34,-36.452 ; Q9.5@4.61,-42.828 4.61,-40.529 ; 4.61,-38.751 Q8.8@4.61,-36.452 ; Q9.8@0.8,-42.028 Q9.8@0.8,-42.828 Q9.8@0.8,-42.028
  Bottom Layer w0.3: v1(-4.84,-36.707) -1.609,-36.707 v2(1.181,-39.497) -0.978,-41.656 v1(-3.899,-41.656)
  Bottom Layer w3: v2(1.181,-39.497) v2@3.544,-39.497 ; v2(2.451,-38.735) 8.875,-32.311 F1.2a@9.64,-32.311 ; F1.2a@9.64,-31.827 F1.2@9.64,-25.58
  other v2: 1.181,-40.259 2.451,-40.259 3.721,-40.259 2.451,-39.497 3.721,-39.497 1.181,-38.735 3.721,-38.735
AC_REF: D16.3 R58.2 TP_AC_REF.1 U5.40 | length 59.1
  Top Layer w0.3: R58.2@-51.865,1.09 -50.101,1.09 -48.805,-0.205 ; TP_AC_REF.1@-48.805,-1.831 -48.805,-0.205 ; v1(-40.894,1.118) -47.482,1.118 -48.805,-0.205 ; v1(-7.086,-9.529) -7.074,-9.541 -7.074,-13.717 -5.726,-15.065 -5.726,-15.382 U5.40@-5.726,-16.182
  Bottom Layer w0.3: v1(-40.894,1.118) -40.488,1.118 -34.29,-5.08 -14.694,-5.08 -10.249,-9.525 -7.09,-9.525 v1(-7.086,-9.529)
CH1_ACT: R49.2 U5.41 | length 51.7
  Top Layer w0.3: R49.2@-34.518,-52.578 -34.518,-52.478 -34.318,-52.278 -33.67,-52.278 -29.351,-47.959 -27.347,-47.959 -23.432,-44.044 -23.432,-34.746 -12.358,-23.673 v1(-9.97,-23.673) ; v1(-5.448,-17.782) -5.226,-17.561 U5.41@-5.226,-16.182
  Bottom Layer w0.3: v1(-9.97,-23.673) -9.56,-23.673 -6.26,-20.373 -6.26,-18.595 v1(-5.448,-17.782)
CH1_BTN: R40.1 S3.2 U5.45 | length 59.1
  Top Layer w0.3: S3.2@-34.25,-49.25 -32.064,-49.25 -29.677,-46.863 -27.688,-46.863 -24.286,-43.461 -24.286,-34.163 -12.576,-22.454 v1@-3.696,-22.454 ; v1(-3.696,-22.428) -2.66,-21.392 -2.66,-19.596 -3.22,-19.036 -3.22,-16.188 U5.45@-3.226,-16.182 ; v1(-0.064,-22.758) 1.091,-22.758 R40.1@1.218,-22.631
  Bottom Layer w0.3: v1(-3.696,-22.428) -0.448,-22.428 -0.118,-22.758 v1(-0.064,-22.758)